# Altium PCB STM32 with USB-C.PcbDoc
Units mm, origin at the board's own origin, x right, y up, seen from the top; angles counter-clockwise.
Board outline 36 x 36 mm, 4 copper layers (L1 (SIgnal), L2 (GND), L3 (GND), L4 (SIgnal)), stack 1.57 mm thick; 38 components, 28 nets, 183 pads, 96 vias.
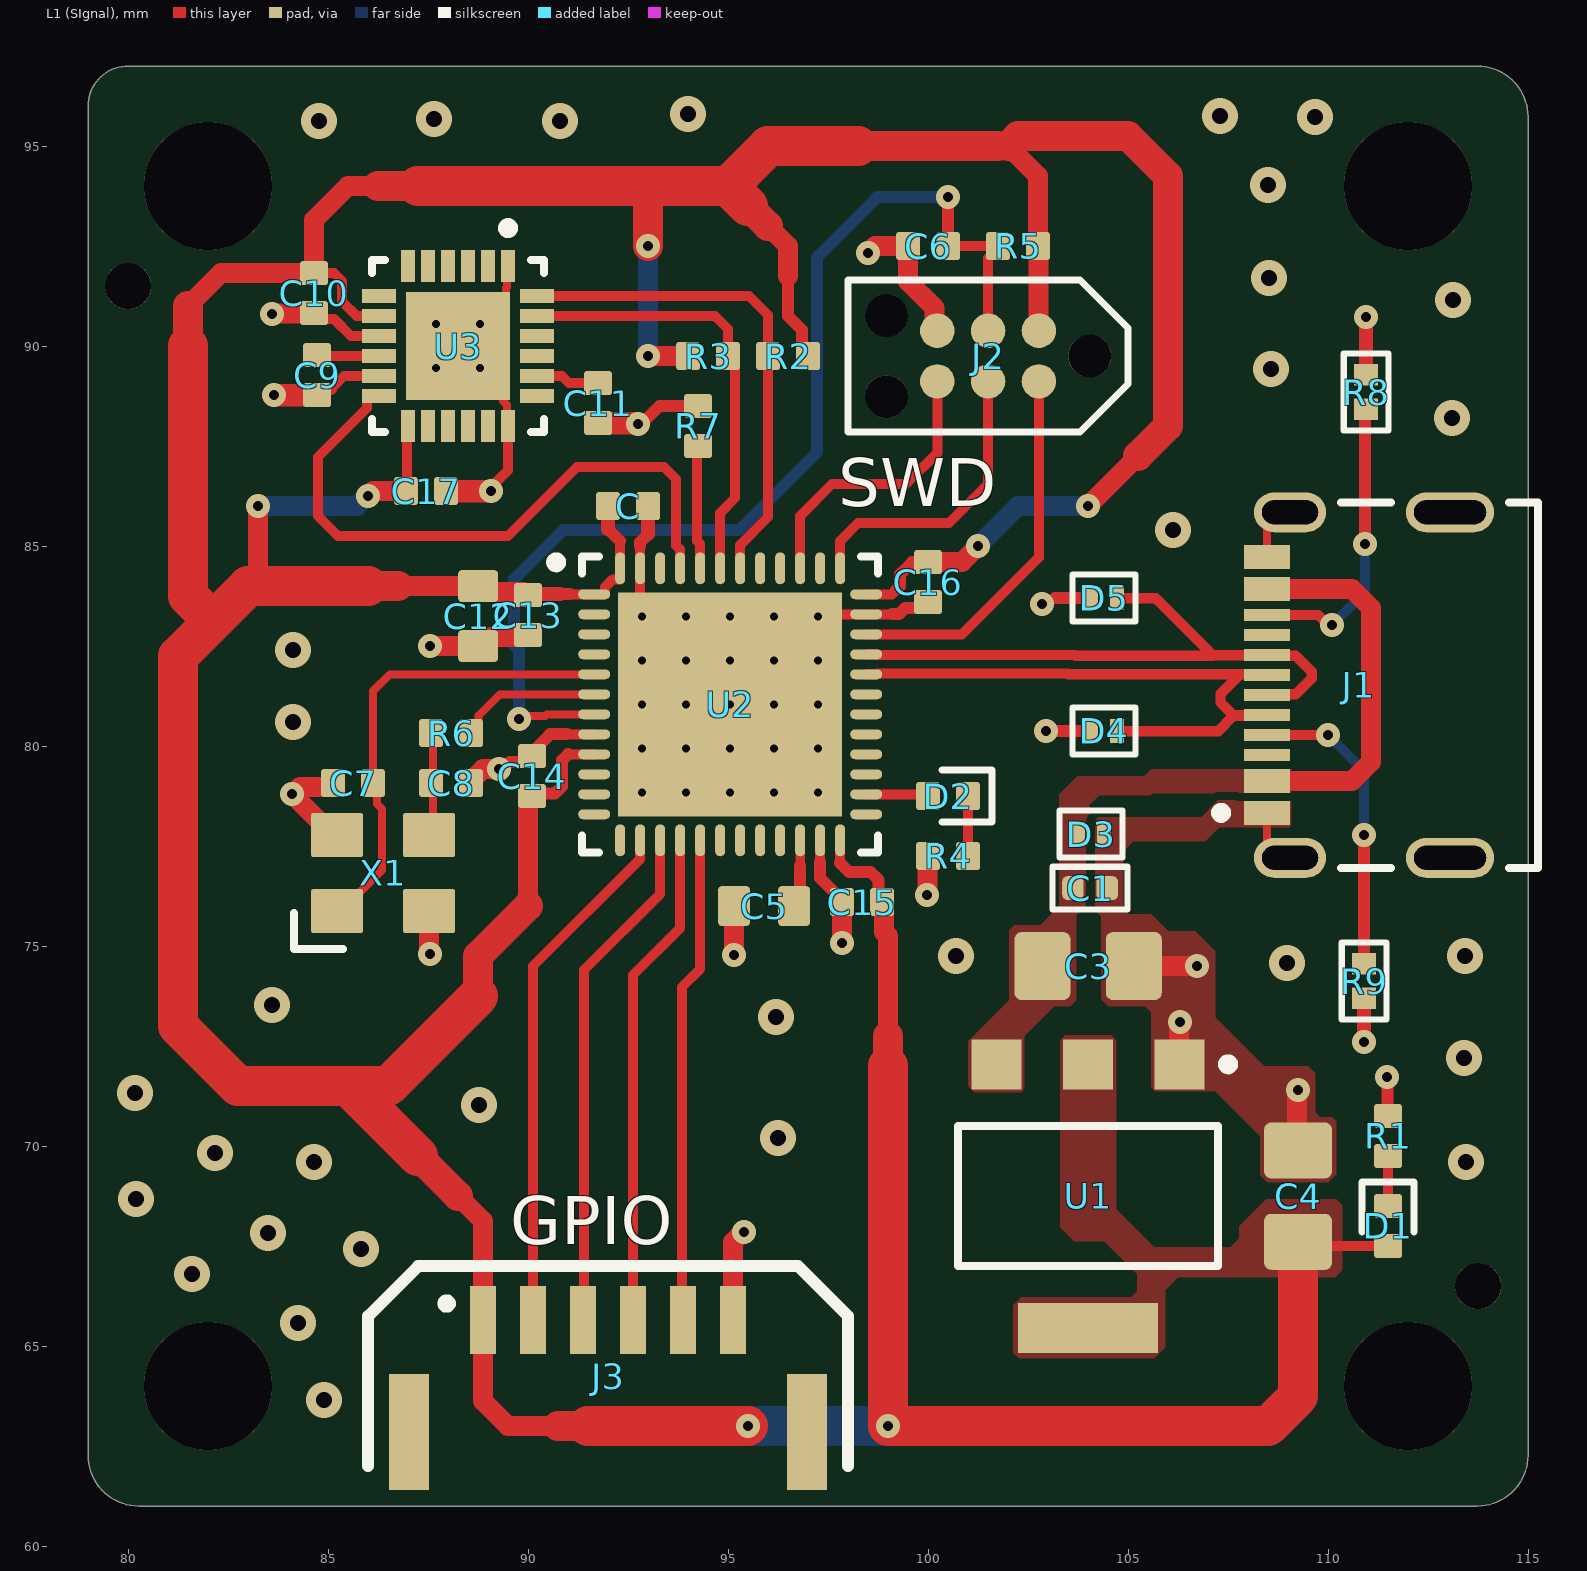
[diagram p0: L1 (SIgnal) view]
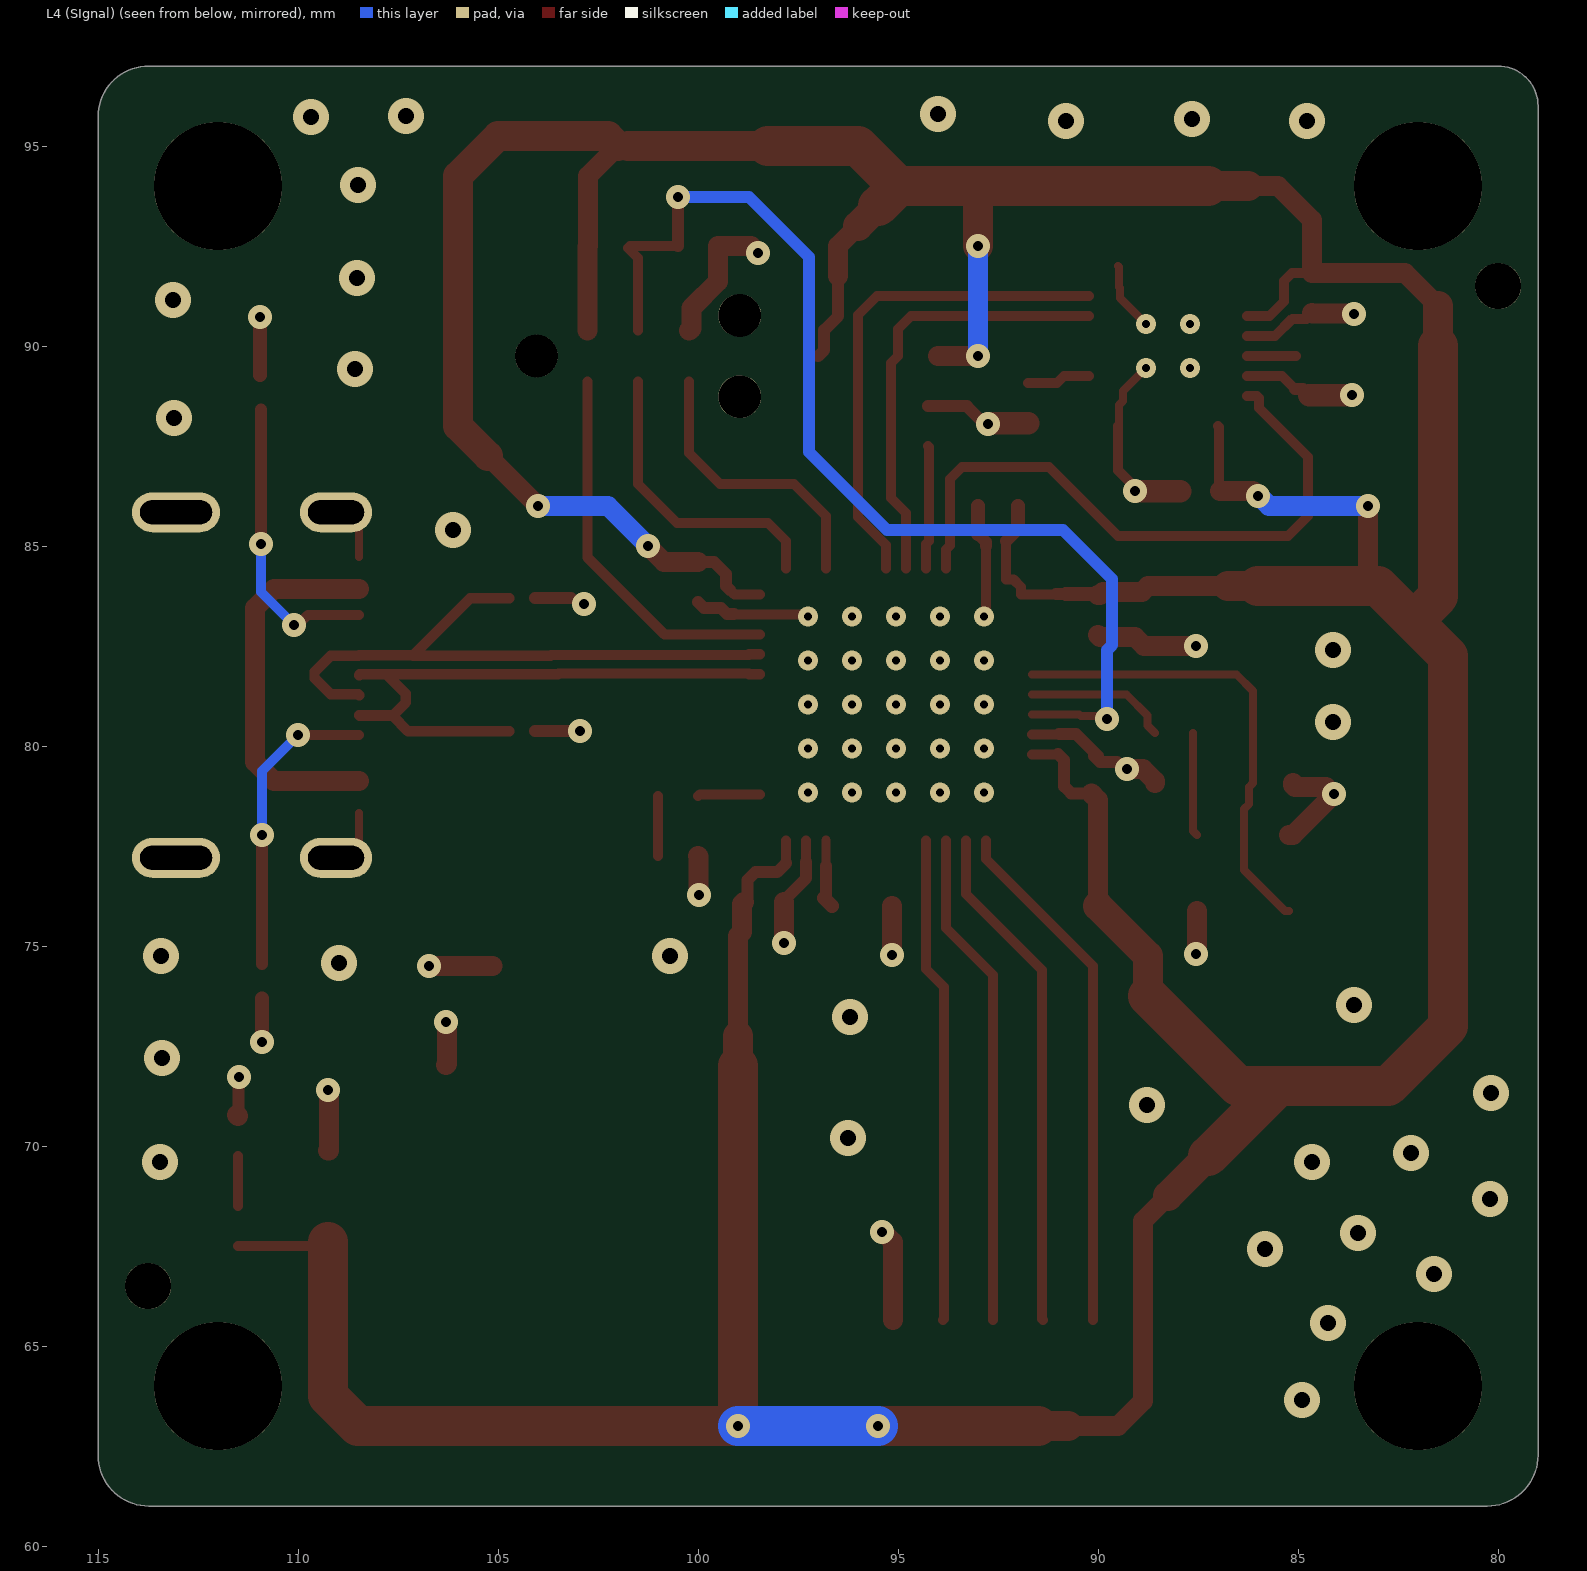
[diagram p1: L4 (SIgnal) view, seen from below]
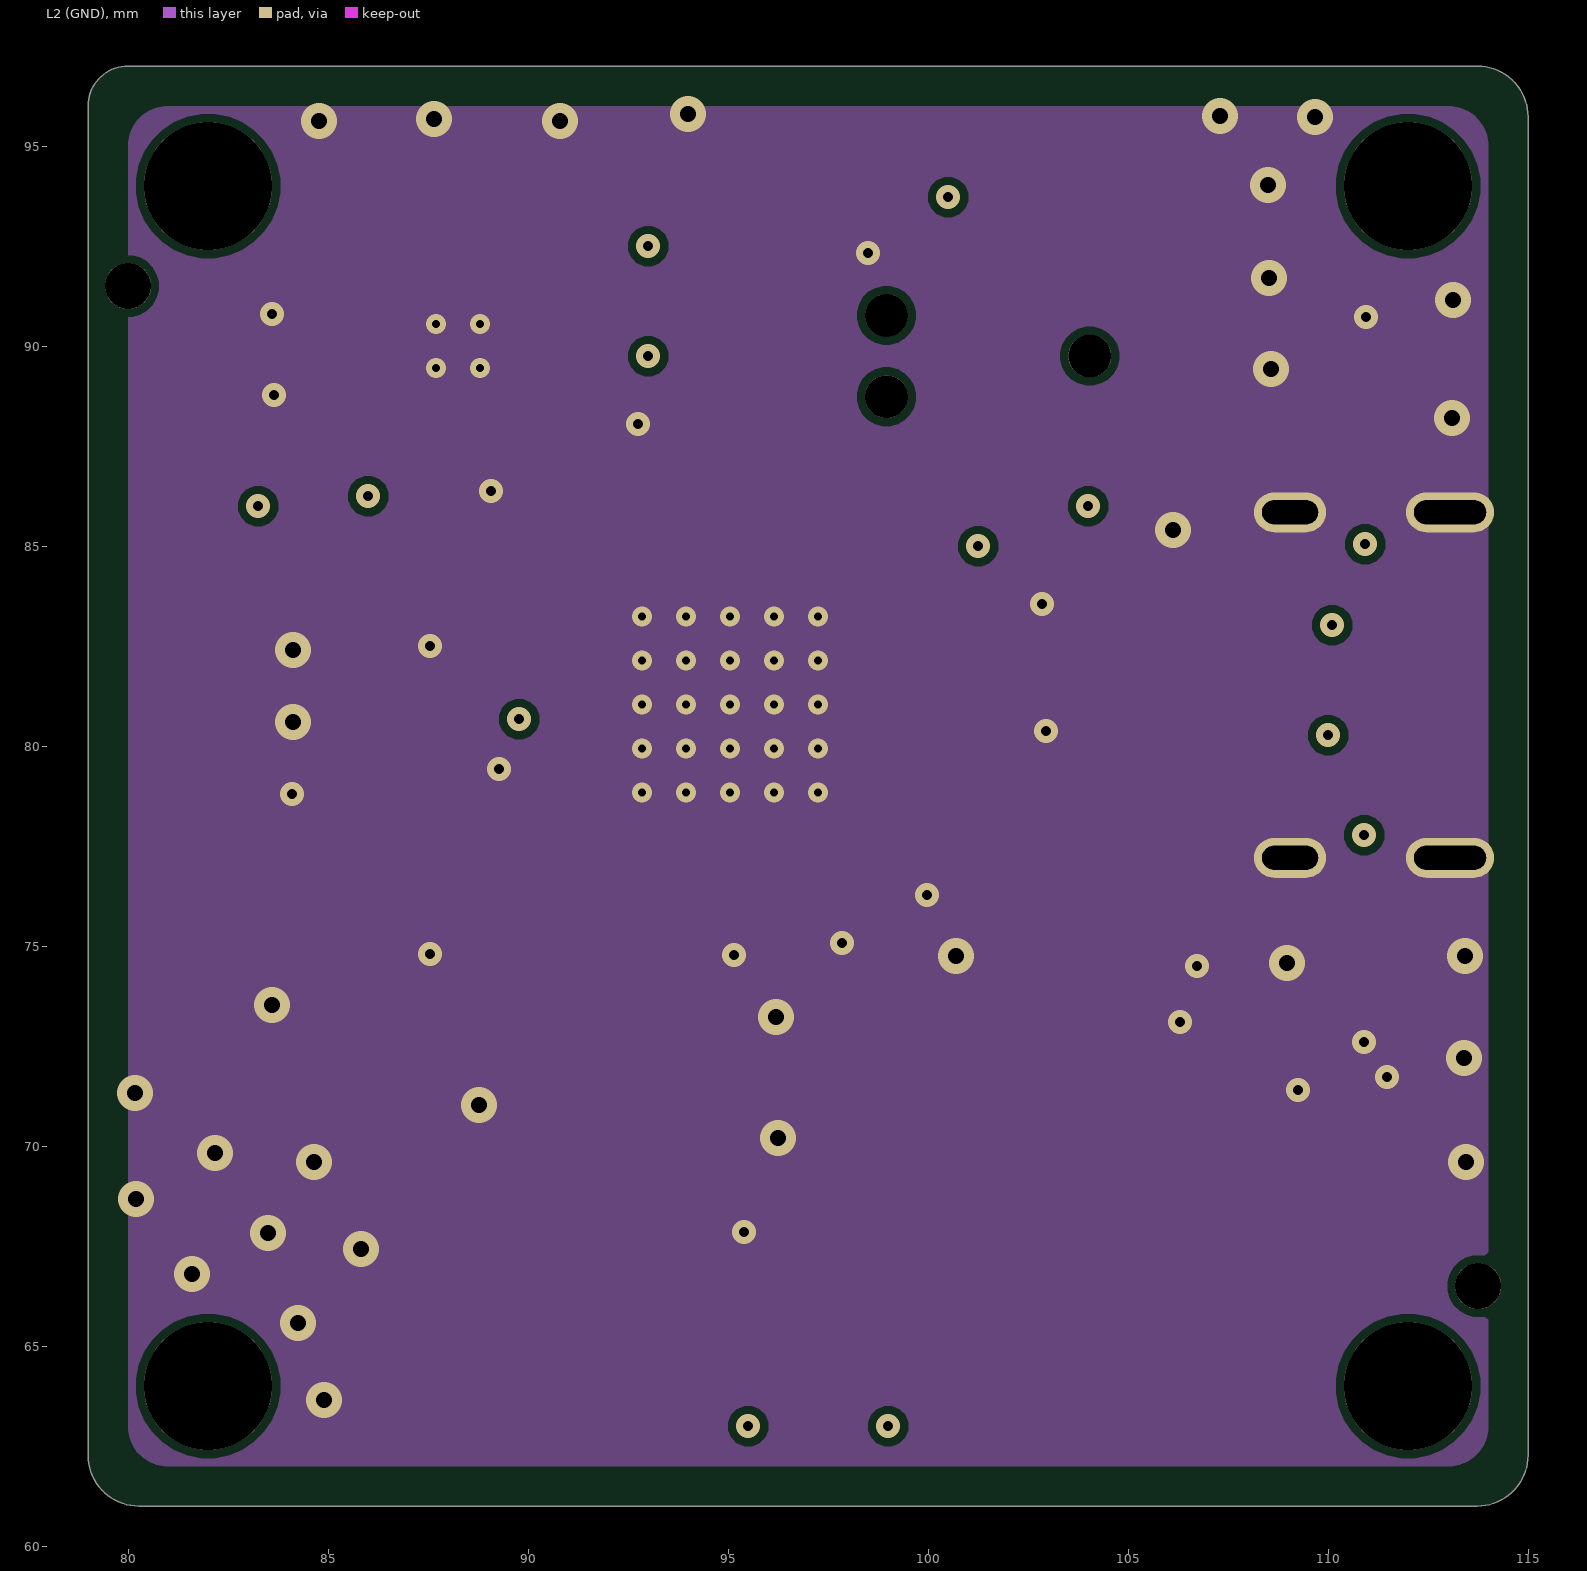
[diagram p2: L2 (GND)]
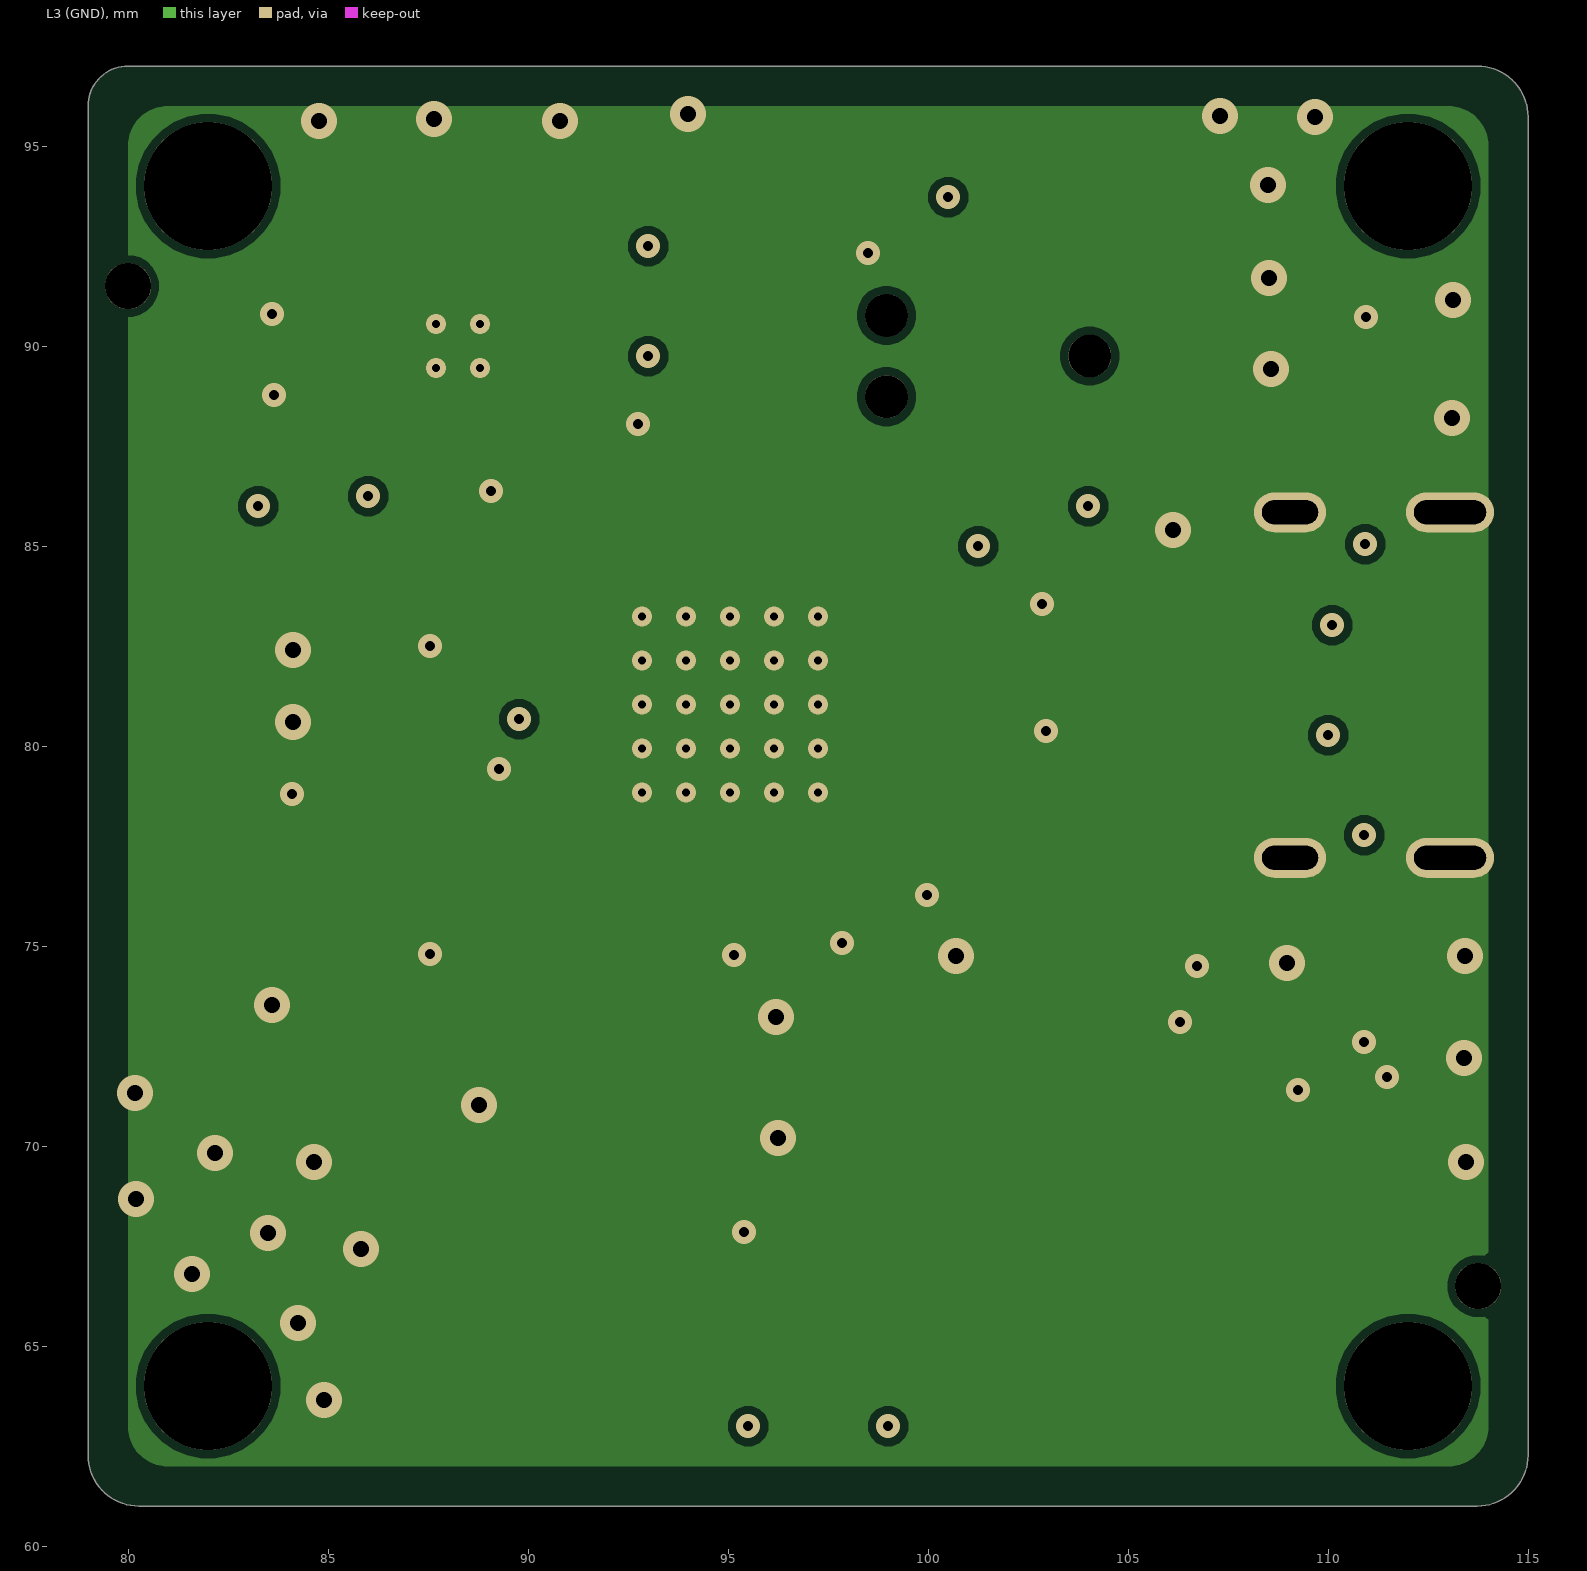
[diagram p3: L3 (GND)]
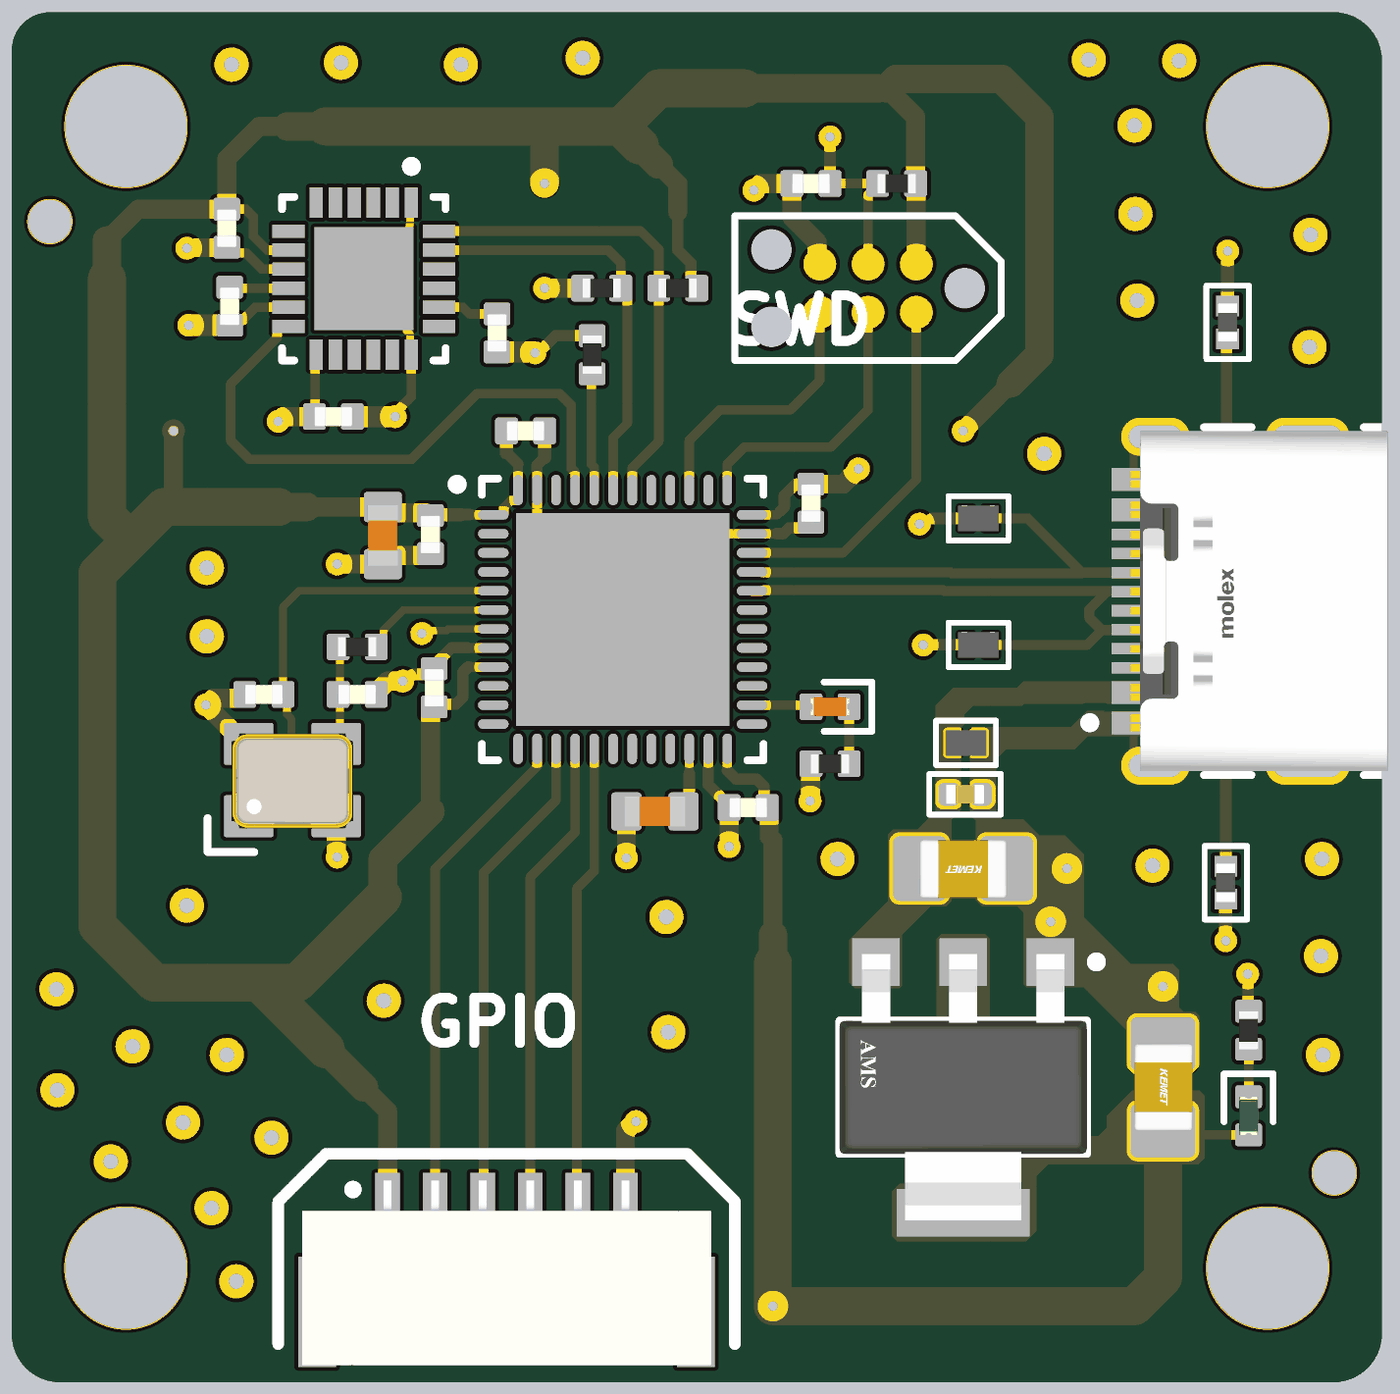
[diagram p4: 3D render of the assembled board from above, using the file's embedded part models]

## Layer stack, top to bottom
Top Solder: solder mask 0.0254, SM-001, Dk 4
L1 (SIgnal): signal copper 0.035
Dielectric 1: prepreg 0.2, PP-017, Dk 4.6
L2 (GND): signal copper 0.0175
Dielectric 3: core 1.065, Core-039, Dk 4.6
L3 (GND): signal copper 0.0175
Dielectric 5: prepreg 0.2, PP-017, Dk 4.6
L4 (SIgnal): signal copper 0.035
Bottom Solder: solder mask 0.0254, SM-001, Dk 4

## Board outline
79,62.27 79,96 cw(c80,96) 80,97 113.73,97 cw(c113.73,95.73) 115,95.73 115,62.27 cw(c113.73,62.27) 113.73,61 80.27,61 cw(c80.27,62.27)

## Design rules (kind name [scope] priority, off if disabled: settings)
Clearance [All] p1: gap=0.2 ignorepadtopadclearanceinfootprint=TRUE
DiffPairsRouting [All] p1: maxlimit=0.254 minlimit=0.203 mostfreqgap=0.254 toplayer_maxgap=0.203 toplayer_prefgap=0.203 toplayer_minwidth=0.26 toplayer_maxwidth=0.26 toplayer_prefwidth=0.26 bottomlayer_maxgap=0.203 bottomlayer_prefgap=0.203 bottomlayer_minwidth=0.26 bottomlayer_maxwidth=0.26 bottomlayer_prefwidth=0.26 impedanceprofiledriven=TRUE impedanceprofileid={7F84C1FC-614D-44AF-B792-7ED8B26A1299} impedanceprofilevalue=90.000000 maxuncoupledlength=12.7
HoleSize [All] p1: absolutevalues=TRUE maxlimit=3.5 minlimit=0.025 maxpercent=80.000 minpercent=20.000
MinimumSolderMaskSliver [All] p1: minsoldermaskwidth=0.1
PolygonConnect [All] p1: connectstyle=Direct reliefconductorwidth=0.254 reliefentries=4 polygonreliefangle="90 Angle" airgapwidth=0.254
RoutingVias [All] p1: holewidth=0.3 width=0.7 viastyle="Through Hole" minholewidth=0.25 minwidth=0.55 maxholewidth=0.4 maxwidth=0.9
SilkToSolderMaskClearance [IsPad] p1: minsilkscreentomaskgap=0 clearancetoexposedcopper=TRUE
SolderMaskExpansion [All] p1: expansion=0.102 istentingtop=FALSE
SupplyNets "Schematic Supply Nets_1" [InNet('+5V')] p1: voltage=0.000
SupplyNets "Schematic Supply Nets_2" [InNet('+3V3')] p2: voltage=0.000
SupplyNets "Schematic Supply Nets" [InNet('GND')] p3: voltage=0.000
UnRoutedNet [All] p1: checkbadconnections=TRUE
Width [All] p1: maxlimit=1 minlimit=0.2 preferedwidth=0.3 midlayer1_minwidth=0.254 midlayer1_maxwidth=0.254 midlayer1_prefwidth=0.254 midlayer2_minwidth=0.254 midlayer2_maxwidth=0.254 midlayer2_prefwidth=0.254 minimp=50.000000 maximp=50.000000 favimp=50.000000
25 further rules are at their usual default settings.

## Classes and differential pairs
differential pair class DIFF_USB: USB_D
differential pair class DIFF90: USB_D
differential pair USB_D: +USB_D_P -USB_D_N

## Components (designator, comment, footprint, x,y, rotation, side; value= is the part's Value field where it differs from the comment)
C "100n" CAP_0402 92.5,86 r180 top
C1 "100nF, 50V" CAPC1005X55N 104.05,76.45 r180 top value=100nF
C3 "22u" CAP_0805 104,74.5 r180 top
C4 "22u" CAP_0805 109.25,68.75 r270 top
C5 "2u2" CAP_0603 95.9,76 r0 top
C6 "100n" CAP_0402 100,92.5 r0 top
C7 "10p" CAP_0402 85.625,79.075 r0 top
C8 "10p" CAP_0402 88.075,79.075 r180 top
C9 "100n" CAP_0402 84.725,89.275 r90 top
C10 "100n" CAP_0402 84.65,91.325 r90 top
C11 "2n2" CAP_0402 91.75,88.575 r90 top
C12 "2u2" CAP_0603 88.75,83.25 r90 top
C13 "100n" CAP_0402 90,83.275 r90 top
C14 "100n" CAP_0402 90.1,79.25 r270 top
C15 "100n" CAP_0402 98.35,76.1 r0 top
C16 "100n" CAP_0402 100,84.1 r90 top
C17 "100n" CAP_0402 87.45,86.375 r180 top
D1 "GREEN" LED_0402_GREEN 111.5,68 r90 top
D2 "RED" LED_0402_RED 100.5,78.75 r0 top
D3 "AQ3045-01ETG" SOD882 104.075,77.8 r180 top
D4 "AQ3045-01ETG" SOD882 104.4,80.375 r0 top
D5 "AQ3045-01ETG" SOD882 104.4,83.7 r0 top
J1 "217179-0001" FP-2171790001-MFG 111.9,81.525 r90 top
J2 "TC2030-NL" TC2030-NL-FP 101.5,89.75 r180 top
J3 "SM06B-GHS-TB" SM06B-GHS-TB 92,64.25 r0 top
R1 "1k" RES_0402 111.5,70.25 r270 top
R2 "2k2" RES_0402 96.5,89.75 r0 top
R3 "2k2" RES_0402 94.5,89.75 r180 top
R4 "1k" RES_0402 100.5,77.25 r0 top
R5 "10k" RES_0402 102.25,92.5 r0 top
R6 "0R" RES_0402 88.075,80.325 r0 top
R7 "10k" RES_0402 94.25,88 r270 top
R8 "5K1" RESC1005X37N 110.95,88.85 r270 top value=5.1kΩ
R9 "5K1" RESC1005X37N 110.9,74.125 r90 top value=5.1kΩ
U1 "ams1117" FP-ams1117-IPC_C 104,68.75 r270 top
U2 "STM32F411CEU6" STM-UFQFPN48_L 95.053,81.045 r0 top
U3 "MPU-6050" IS-QFN-24_V 88.25,90 r270 top
X1 "24MHz" XTAL_3225 86.375,76.825 r0 top

## Footprints (in the part's own frame and the unit in brackets; to place one, negate y for a bottom-side part, rotate by r counter-clockwise, add the part's x,y. Pads: shape width x height; smd on the part's side, far side on the other; paste and mask are expansions set on the pad)
CAP_0402 [mm]
  rrect25% 0.6x0.7 smd: 1(-0.5,0) 2(0.5,0)
  body extent -0.5,-0.26 0.5,0.26, height 0.37
CAP_0603 [mm]
  rrect25% 0.8x1 smd: 1(-0.75,0) 2(0.75,0)
  body extent -0.8,-0.4 0.8,0.4, height 0.51
CAP_0805 [mm]
  rrect25% 1.4x1.7 smd: 1(-1.143,0) 2(1.143,0)
  body extent -1.15,-0.76 1.15,0.79, height 1.01
CAPC1005X55N [mm]
  rrect53% 0.54x0.6 smd: 1(-0.43,0) 2(0.43,0)
  silkscreen extent -0.94,-0.53 0.94,0.53, body extent -0.5,-0.25 0.5,0.25, height 0.55
FP-2171790001-MFG [mm]
  rect 0.6x1.15 smd paste+0 mask+0: A1B12(-3.2,3.425) A4B9(-2.4,3.425) B1A12(3.2,3.425) B4A9(2.4,3.425)
  rect 0.3x1.15 smd paste+0 mask+0: A5(-1.25,3.425) A6(-0.25,3.425) A7(0.25,3.425) A8(1.25,3.425) B5(1.75,3.425) B6(0.75,3.425) B7(-0.75,3.425) B8(-1.75,3.425)
  rrect100% 1x1.8 hole 1.4 slot 0.6 at 0 deg paste-2539.97 mask+0: S1(-4.32,2.85) S2(4.32,2.85)
  rrect100% 1x2.2 hole 1.8 slot 0.6 at 0 deg paste-2539.97 mask+0: S3(-4.32,-1.15) S4(4.32,-1.15)
  silkscreen extent -4.57,-3.35 4.57,4.7, body extent -4.92,-3.45 4.92,4.1, height 0.25
FP-ams1117-IPC_C [mm]
  rect 1.25x1.25 smd paste+0 mask+0: 1(-3.295,2.29) 2(-3.295,0) 3(-3.295,-2.29)
  rect 1.25x3.5 smd paste+0 mask+0: 4(3.295,0)
  silkscreen extent -3.42,-3.25 1.75,3.63, body extent -3.9,-3.35 3.9,3.35, height 0.25
IS-QFN-24_V [mm] "QFN, 24-Leads, Body 4x4mm, Pitch 0.5mm, Thermal Pad 2.7x2.6mm"
  rect 0.8x0.35 smd: 1(-2,1.25) 2(-2,0.75) 3(-2,0.25) 4(-2,-0.25) 5(-2,-0.75) 6(-2,-1.25) 13(2,-1.25) 14(2,-0.75) 15(2,-0.25) 16(2,0.25) 17(2,0.75) 18(2,1.25)
  rect 0.35x0.85 smd mask+0.102: 7(-1.25,-1.975) 8(-0.75,-1.975) 9(-0.25,-1.975) 10(0.25,-1.975) 11(0.75,-1.975) 12(1.25,-1.975) 19(1.25,1.975) 20(0.75,1.975) 21(0.25,1.975) 22(-0.25,1.975) 23(-0.75,1.975) 24(-1.25,1.975)
  rect 2.7x2.6 smd: 25(0,0)
  silkscreen extent -3.07,-2.15 2.15,2.15, body extent -2,-2 2,2, height 0.95
LED_0402_GREEN [mm]
  rrect25% 0.6x0.7 smd: A(-0.5,0) K(0.5,0)
  silkscreen extent -0.15,-0.65 1.1,0.65, body extent -0.51,-0.25 0.51,0.25, height 0.45
LED_0402_RED [mm]
  rrect25% 0.6x0.7 smd: A(-0.5,0) K(0.5,0)
  silkscreen extent -0.15,-0.65 1.1,0.65, body extent -0.51,-0.25 0.51,0.25, height 0.45
RES_0402 [mm]
  rrect25% 0.6x0.7 smd: 1(-0.5,0) 2(0.5,0)
  body extent -0.5,-0.25 0.5,0.25, height 0.3
RESC1005X37N [mm]
  rect 0.54x0.6 smd: 1(-0.432,0) 2(0.432,0)
  silkscreen extent -0.97,-0.56 0.97,0.56, body extent -0.5,-0.25 0.5,0.25, height 0.37
SM06B-GHS-TB [mm]
  rect 0.65x1.7 smd: 1(-3.125,1.4) 2(-1.875,1.4) 3(-0.625,1.4) 4(0.625,1.4) 5(1.875,1.4) 6(3.125,1.4)
  rect 1x2.9 smd: ""(-4.975,-1.4) ""(4.975,-1.4)
  silkscreen extent -6,-2.25 6,2.75, body extent -5.38,-2.8 5.38,2.05, height 4.26
SOD882 [mm]
  rect 0.35x0.6 smd: 1(-0.325,0) 2(0.325,0)
  silkscreen extent -0.79,-0.58 0.79,0.58, body extent -0.54,-0.34 0.54,0.34, height 0.44
STM-UFQFPN48_L [mm] "QFN, 48-Leads, Body 7.1x7.1mm, Pitch 0.5mm, Thermal Pad 5.6x5.6mm, IPC High Density"
  oval 0.8x0.25 smd: 1(-3.4,2.75) 2(-3.4,2.25) 3(-3.4,1.75) 4(-3.4,1.25) 5(-3.4,0.75) 6(-3.4,0.25) 7(-3.4,-0.25) 8(-3.4,-0.75) 9(-3.4,-1.25) 10(-3.4,-1.75) 11(-3.4,-2.25) 12(-3.4,-2.75) 25(3.4,-2.75) 26(3.4,-2.25) 27(3.4,-1.75) 28(3.4,-1.25) 29(3.4,-0.75) 30(3.4,-0.25) 31(3.4,0.25) 32(3.4,0.75) 33(3.4,1.25) 34(3.4,1.75) 35(3.4,2.25) 36(3.4,2.75)
  oval 0.25x0.8 smd: 13(-2.75,-3.4) 14(-2.25,-3.4) 15(-1.75,-3.4) 16(-1.25,-3.4) 17(-0.75,-3.4) 18(-0.25,-3.4) 19(0.25,-3.4) 20(0.75,-3.4) 21(1.25,-3.4) 22(1.75,-3.4) 23(2.25,-3.4) 24(2.75,-3.4) 37(2.75,3.4) 38(2.25,3.4) 39(1.75,3.4) 40(1.25,3.4) 41(0.75,3.4) 42(0.25,3.4) 43(-0.25,3.4) 44(-0.75,3.4) 45(-1.25,3.4) 46(-1.75,3.4) 47(-2.25,3.4) 48(-2.75,3.4)
  rect 5.6x5.6 smd: 49(0,0)
  silkscreen extent -4.47,-3.7 3.7,3.7, body extent -3.55,-3.55 3.55,3.55, height 0.6
TC2030-NL-FP [mil]
  round 33.98 smd paste-16.99: 1(-50,-25) 2(-50,25) 3(0,-25) 4(0,25) 5(50,-25) 6(50,25)
  round 42.01 hole 42.01 unplated: MH(-100,0) MH(100,-40) MH(100,40)
  silkscreen extent -138,-75 138,75
XTAL_3225 [mm]
  rrect10% 1.3x1.1 smd: 1(-1.15,-0.95) 2(1.15,-0.95) 3(1.15,0.95) 4(-1.15,0.95)
  silkscreen extent -2.23,-1.89 -1,-1, body extent -1.6,-1.28 1.6,1.22, height 0.61

## Part data
C C6 C13 C14 C15 C16 C17: library part CAP_0402, "Capacitor SMD 0402"
C1: library part CL05B104KB5NNNC, "CAP CER 0.1UF 50V X7R 0402", Case/Package=0402, Dielectric=X7R, Dielectric Material=Ceramic, Manufacturer="Samsung Electro-Mechanics", Max Operating Temperature=125°C, Min Operating Temperature=-55°C, Supplier Part Number=1276-CL05B104KB5NNNCCT-ND, Tolerance=10%, Voltage Rating=50V, Category="Ceramic Capacitors", China RoHS=Compliant, ComponentLink1Description=https://datasheet.octopart.com:443/CL05B104KB5NNNC-Samsung-Electro-Mechanics-datasheet-141346860.pdf?src-supplier=IHS, ComponentLink1URL=https://datasheet.octopart.com:443/CL05B104KB5NNNC-Samsung-Electro-Mechanics-datasheet-141346860.pdf?src-supplier=IHS, ComponentLink2Description=https://datasheet.octopart.com:443/CL05B104KB5NNNC-Samsung-datasheet-97040617.pdf?src-supplier=Future+Electronics, ComponentLink2URL=https://datasheet.octopart.com:443/CL05B104KB5NNNC-Samsung-datasheet-97040617.pdf?src-supplier=Future+Electronics, ComponentLink3Description=https://datasheet.octopart.com:443/CL05B104KB5NNNC-Samsung-datasheet-8326407.pdf?src-supplier=TME, ComponentLink3URL=https://datasheet.octopart.com:443/CL05B104KB5NNNC-Samsung-datasheet-8326407.pdf?src-supplier=TME, Height=550µm, LCSC Part Number=CL05B104KB5NNNC, Lifecycle Status=Production, Manufacturer Part Number=CL05B104KB5NNNC, Material=Ceramic, Mounting Technology="Surface Mount", Number of Terminals=2, Pricing="1=0.08, 10=0.010, 50=0.0088, 100=0.008 (USD)", REACH SVHC=Yes, RoHS=Compliant, Stock=1636938, Supplier=DigiKey, Voltage Rating (DC)=50V
C3 C4: library part CAP_0805, "Capacitor SMD 0805 16V"
C5 C12: library part CAP_0603, "Capacitor SMD 0603"
C7 C8 C9 C10 C11: library part CAP_0402, "Capacitor SMD 0402 16V"
D1: library part LED_0402_GREEN, "LED 0402 GREEN SMD"
D2: library part LED_0402_RED, "LED 0402 RED SMD"
D3 D4 D5: "Bi 30Kv 5V 0.35Pf Automotve Tvs Sod882/ T&r Rohs Compliant: Yes", Breakdown Voltage=7.8V, Clamping Voltage=12V, Leakage Current=100nA, Manufacturer=Littelfuse, Max Breakdown Voltage=9V, Max Operating Temperature=150°C, Min Breakdown Voltage=6.8V, Min Operating Temperature=-40°C, Operating Supply Voltage=5.3V, Peak Pulse Power=40W, Supplier Part Number=F9321CT-ND, Category="TVS Diodes", ComponentLink1Description=https://datasheet.octopart.com:443/AQ3045-01ETG-Littelfuse-datasheet-180606588.pdf?src-supplier=IHS, ComponentLink1URL=https://datasheet.octopart.com:443/AQ3045-01ETG-Littelfuse-datasheet-180606588.pdf?src-supplier=IHS, ComponentLink2Description=https://datasheet.octopart.com:443/AQ3045-01ETG-Littelfuse-datasheet-140480283.pdf?src-supplier=ODG+(Origin+Data+Global), ComponentLink2URL=https://datasheet.octopart.com:443/AQ3045-01ETG-Littelfuse-datasheet-140480283.pdf?src-supplier=ODG+(Origin+Data+Global), ComponentLink3Description=https://datasheet.octopart.com:443/AQ3045-01ETG-Littelfuse-datasheet-101609968.pdf?src-supplier=Farnell, ComponentLink3URL=https://datasheet.octopart.com:443/AQ3045-01ETG-Littelfuse-datasheet-101609968.pdf?src-supplier=Farnell, ComponentLink4Description=https://datasheet.octopart.com:443/AQ3045-01ETG-Littelfuse-datasheet-183003566.pdf?src-supplier=JRH+Electronics, ComponentLink4URL=https://datasheet.octopart.com:443/AQ3045-01ETG-Littelfuse-datasheet-183003566.pdf?src-supplier=JRH+Electronics, ComponentLink5Description=https://datasheet.octopart.com:443/AQ3045-01ETG-Littelfuse-datasheet-170904929.pdf?src-supplier=Future+Electronics, ComponentLink5URL=https://datasheet.octopart.com:443/AQ3045-01ETG-Littelfuse-datasheet-170904929.pdf?src-supplier=Future+Electronics, Lifecycle Status=Production, Manufacturer Part Number=AQ3045-01ETG, Mounting Technology="Surface Mount", Number of Channels=1, Number of Elements=1, Number of Terminals=2, Packaging="Cut Tape", Peak Reverse Current=100nA, Polarity=Bidirectional, Pricing="1=0.43, 10=0.271, 100=0.141, 500=0.131 (USD)", REACH SVHC=Yes, Reverse Standoff Voltage=5.3V, RoHS=Compliant, Stock=11182, Supplier=DigiKey
J1: "USB Connector, USB Type C, USB 2.0, Receptacle, 16 Ways, Surface Mount, Through Hole Mount", Contact Resistance=50mΩ, Current Rating=1.25A, Dielectric Material=Polyamide, Insulation Resistance=100MΩ, LCSC Part Number=C3197684, Manufacturer=Molex, Max Operating Temperature=85°C, Min Operating Temperature=-40°C, Supplier Part Number=900-2171790001DKR-ND, Voltage Rating=30V, Category="USB Connectors", ComponentLink1Description=https://datasheet.octopart.com:443/217179-0001-Molex-datasheet-158871109.pdf?src-supplier=ODG+(Origin+Data+Global), ComponentLink1URL=https://datasheet.octopart.com:443/217179-0001-Molex-datasheet-158871109.pdf?src-supplier=ODG+(Origin+Data+Global), ComponentLink2Description=https://sigma.octopart.com:443/158871110/technical_drawing/Molex-217179-0001.pdf?src-supplier=Upverter, ComponentLink2URL=https://sigma.octopart.com:443/158871110/technical_drawing/Molex-217179-0001.pdf?src-supplier=Upverter, ComponentLink3Description=https://datasheet.octopart.com:443/217179-0001-Molex-datasheet-164573281.pdf?src-supplier=RS+(Formerly+Allied+Electronics), ComponentLink3URL=https://datasheet.octopart.com:443/217179-0001-Molex-datasheet-164573281.pdf?src-supplier=RS+(Formerly+Allied+Electronics), ComponentLink4Description=http://sigma.octopart.com:80/conflict_mineral_statement/Molex-company-72.pdf?src-supplier=Compliance+Statements, ComponentLink4URL=http://sigma.octopart.com:80/conflict_mineral_statement/Molex-company-72.pdf?src-supplier=Compliance+Statements, ComponentLink5Description=http://sigma.octopart.com:80/rohs_statement/Molex-company-73.pdf?src-supplier=Compliance+Statements, ComponentLink5URL=http://sigma.octopart.com:80/rohs_statement/Molex-company-73.pdf?src-supplier=Compliance+Statements, ComponentLink6Description=http://sigma.octopart.com:80/reach_statement/Molex-company-74.pdf?src-supplier=Compliance+Statements, ComponentLink6URL=http://sigma.octopart.com:80/reach_statement/Molex-company-74.pdf?src-supplier=Compliance+Statements, Contact Gender=Female, Contact Material="Gold, Nickel", Gender=Receptacle, Height=3.36mm, Lifecycle Status=Production, Manufacturer Part Number=217179-0001, Number Of Contacts=16, Number of Ports=1, Number of Rows=1, Pins=16, Pricing="1=0.83, 10=0.704, 25=0.6596, 50=0.628, 100=0.598, 250=0.56052, 500=0.53374 (USD)", REACH SVHC=Yes, RoHS=Compliant, Shell Finish=Nickel, Shell Material="Stainless Steel", Stock=29627, Supplier=DigiKey, Terminal Pitch=500µm, Usb Standard="USB 2.0"
J2: "Tag-Connect No-Solder SWD Debug Connector (No Legs) DO NOT PLACE", Manufacturer=Tag-Connect, Manufacturer Part Number=TC2030-NL-FP
J3: "Header Connector 6 Position 1.25MM Pitch SMD Horizontal JST GH", Manufacturer=JST, Manufacturer Part Number=SM06B-GHS-TB
R1 R2 R3 R4 R5 R7: library part RES_0402, "Resistor SMD 0402"
R6: library part RES_0402, "Resistor SMD 0402 0R"
R8 R9: library part AC0402FR-075K1L, "Res Thick Film 0402 5.1K Ohm 1% 0.063W(1/16W) ±100ppm/C Pad SMD Automotive T/R", Case Code (Imperial)=0402, Case Code (Metric)=1005, LCSC Part Number=C144745, Manufacturer="Yageo Group", Max Operating Temperature=155°C, Max Power Dissipation=63mW, Min Operating Temperature=-55°C, Power Dissipation=62.5mW, Supplier Part Number=YAG3503CT-ND, Temperature Coefficient=100ppm/°C, Tolerance=1%, Voltage Rating=50V, Case/Package=0402, Category="Chip SMD Resistors", China RoHS=Non-Compliant, ComponentLink1Description=https://datasheet.octopart.com:443/AC0402FR-075K1L-Yageo-datasheet-182189377.pdf?src-supplier=IHS, ComponentLink1URL=https://datasheet.octopart.com:443/AC0402FR-075K1L-Yageo-datasheet-182189377.pdf?src-supplier=IHS, ComponentLink2Description=https://datasheet.octopart.com:443/AC0402FR-075K1L-Yageo-datasheet-83209224.pdf?src-supplier=Upverter, ComponentLink2URL=https://datasheet.octopart.com:443/AC0402FR-075K1L-Yageo-datasheet-83209224.pdf?src-supplier=Upverter, ComponentLink3Description=https://datasheet.octopart.com:443/AC0402FR-075K1L-Yageo-datasheet-178509465.pdf?src-supplier=Newark, ComponentLink3URL=https://datasheet.octopart.com:443/AC0402FR-075K1L-Yageo-datasheet-178509465.pdf?src-supplier=Newark, ComponentLink4Description=https://datasheet.octopart.com/AC0402FR-075K1L-Yageo-datasheet-12512238.pdf, ComponentLink4URL=https://datasheet.octopart.com/AC0402FR-075K1L-Yageo-datasheet-12512238.pdf, ComponentLink5Description=https://datasheet.octopart.com:443/AC0402FR-075K1L-Yageo-datasheet-166720450.pdf?src-supplier=Future+Electronics, ComponentLink5URL=https://datasheet.octopart.com:443/AC0402FR-075K1L-Yageo-datasheet-166720450.pdf?src-supplier=Future+Electronics, ComponentLink6Description=https://datasheet.octopart.com:443/AC0402FR-075K1L-Yageo-datasheet-151884373.pdf?src-supplier=Future+Electronics, ComponentLink6URL=https://datasheet.octopart.com:443/AC0402FR-075K1L-Yageo-datasheet-151884373.pdf?src-supplier=Future+Electronics, ComponentLink7Description=https://datasheet.octopart.com:443/AC0402FR-075K1L-Yageo-datasheet-137699919.pdf?src-supplier=Future+Electronics, ComponentLink7URL=https://datasheet.octopart.com:443/AC0402FR-075K1L-Yageo-datasheet-137699919.pdf?src-supplier=Future+Electronics, ComponentLink8Description=https://datasheet.octopart.com:443/AC0402FR-075K1L-Yageo-datasheet-24580492.pdf?src-supplier=Future+Electronics, ComponentLink8URL=https://datasheet.octopart.com:443/AC0402FR-075K1L-Yageo-datasheet-24580492.pdf?src-supplier=Future+Electronics, ComponentLink9Description=https://datasheet.octopart.com:443/AC0402FR-075K1L-Yageo-datasheet-13029202.pdf?src-supplier=Future+Electronics, ComponentLink9URL=https://datasheet.octopart.com:443/AC0402FR-075K1L-Yageo-datasheet-13029202.pdf?src-supplier=Future+Electronics, ComponentLink10Description=https://datasheet.octopart.com:443/AC0402FR-075K1L-Yageo-Group-datasheet-164768995.pdf?src-supplier=ODG+(Origin+Data+Global), ComponentLink10URL=https://datasheet.octopart.com:443/AC0402FR-075K1L-Yageo-Group-datasheet-164768995.pdf?src-supplier=ODG+(Origin+Data+Global), ComponentLink11Description=http://sigma.octopart.com:80/rohs_statement/Yageo-company-2.pdf?src-supplier=Compliance+Statements, ComponentLink11URL=http://sigma.octopart.com:80/rohs_statement/Yageo-company-2.pdf?src-supplier=Compliance+Statements, ComponentLink12Description=http://sigma.octopart.com:80/conflict_mineral_statement/Yageo-company-3.pdf?src-supplier=Compliance+Statements, ComponentLink12URL=http://sigma.octopart.com:80/conflict_mineral_statement/Yageo-company-3.pdf?src-supplier=Compliance+Statements, Composition="Thick Film", Depth=500µm, Features="Automotive AEC-Q200, Moisture Resistant", Height=320µm, Lead Free="Lead Free", Length=990.6µm, Lifecycle Status=Production, Manufacturer Part Number=AC0402FR-075K1L, Military Standard=Not, Mounting Technology="Surface Mount", Number of Terminals=2, Number of Terminations=2, Power Rating=62.5mW, Pricing="1=0.1, 10=0.009, 25=0.008, 50=0.0072, 100=0.0066, 250=0.00576, 500=0.00406 (USD)", REACH SVHC=Yes, RoHS=Compliant, Schedule B="8533210045, 8533210045|8533210045|8533210045|8533210045|8533210045|8533210045|8533210045|8533210045|8533210045|8533210045|8533210045|8533210045|8533210045|8533210045|8533210045|8533210045|8533210045|8533210045|8533210045|8533210045|8533210045|8533210045|8533210045|85", Stock=29422, Supplier=DigiKey, Width=500µm, Working Voltage=50V
U1: library part CMP-209535-000002-1, "1A LOW DROPOUT VOLTAGE REGULATOR", RoHS Compliant=Yes
U2: library part CMP-0243-00165-1, "ARM Cortex-M4 32-bit MCU+FPU, 512 KB Flash, 128 KB RAM, 36 I/Os, 48-Pin UFQFPN, -40 to 85 degC, Tray", I/Os (High Current)=36, Operating Frequency(F) (Processor speed) (MHz)=100, Package Description=UFQFPN48, Package Reference="48-Pin Ultra Thin Fine Pitch Quad Flat No-Lead, 7 x 7 x 0.6 mm Body, 0.5 mm Pitch, Exposed Pad", Supply Voltage(Vcc) min (V)=1.7, ComponentLink1Description="Manufacturer URL", ComponentLink1URL=http://www.st.com/, ComponentLink2Description=Datasheet, ComponentLink2URL=http://www.st.com/st-web-ui/static/active/en/resource/technical/document/datasheet/DM00115249.pdf, Core="ARM Cortex-M4", DatasheetVersion="Rev. 6", FLASH Size (Prog) (kB)=512, Internal RAM Size (kB)=128, Mounting Technology="Surface Mount", Packing=Tray
U3: library part CMP-1753-00002-2, "3-Axis Gyroscope, Accelerometer and a Digital Motion Processor(TM) (DMP), 2.375 to 3.46 V, -40 to 85 degC, 24-Pin QFN, RoHS, Tape and Reel", Manufacturer=InvenSense, Standard Package=5,000, Category=Sensors,Transducers, Datasheet URL=http://datasheet.octopart.com/MPU-6050-InvenSense-datasheet-14421344.pdf, Datasheet Version="Rev. 3.3, 05/2012", Dynamic Catalog=MPU-6000™Series, Family=Multifunction, Featured Product=MPU-60506-Axis,IntegratedI²CSolution, Manufacturer URL=http://www.invensense.com/, Online Catalog=MPU-6000™Series, Other Names="1428-1007-2 / MPU6050", Output Type=Digital, Sensor Type=MotionTracking, Unit PriceUSD=Digital
X1: library part TSX-3225_24.0000MF15X-AC, "Crystal SMD 24MHz 10PPM 7pF 3225", Manufacturer=Epson, Manufacturer Part Number="TSX-3225 24.0000MF15X-AC"

## Free pads (board coordinates)
  round 3.2 hole 3.2: MH(82,64) MH(82,94) MH(112,64) MH(112,94)
  round 1.152 hole 1.152: TH(80,91.5) TH(113.75,66.5)

## Via types
v1: diameter 0.6, hole 0.25, L1 (SIgnal) to L4 (SIgnal), 35 vias
v2: diameter 0.9, hole 0.4, L1 (SIgnal) to L4 (SIgnal), 32 vias
v3: diameter 0.5, hole 0.2, L1 (SIgnal) to L4 (SIgnal), 29 vias

## Nets (pads, with @x,y where several pads share a name; then routed paths per layer and width w, separated by ;. In a path a pad name is that pad's centre, name@x,y a point inside that pad or via, vN(x,y) a via of type N, cw(c..) or ccw(c..) an arc to the next point about the centre after c; other vN are vias at no path point)
+3V3: C4.2 C10.2 C12.2 C13.2 C14.2 C15.2 C16.2 C17.2 C.2 D1.A J2.1 J3.1 R2.2 R3.2 R5.2 U1.2 U1.4 U2.1 U2.9 U2.24 U2.36 U2.48 U3.8 U3.13 | length 168.5
  L1 (SIgnal) w0.25: C10.2 85.15,91.825 85.35,91.625 85.35,91.115 85.715,90.75 U3.8 ; C17.2 86.975,86.4 86.975,87.975 U3.13 ; 91,79.8 91.005,79.795 U2.9 ; 91.05,83.8 91.055,83.795 91.928,83.795 91.928,83.979 92.118,84.17 92.303,84.17 92.303,85.12 92.3,85.122 ; 97.8,77.075 97.803,77.078 U2.24 ; U2.36 99.095,83.795 99.2,83.9 ; C4.2 109.357,67.5 D1.A
  L1 (SIgnal) w0.3: C14.2@90.168,78.818 90.674,78.818 90.85,78.994 90.85,79.65 91,79.8 ; 90.8,83.8 91.05,83.8 ; 92,85.425 92.3,85.125 92.3,85.122 ; 96.5,91.75 96.5,90.75 96.85,90.4 96.85,89.9 R2.2 ; 97.8,77.075 98.025,76.85 98.567,76.85 98.762,76.655 98.762,76.188 C15.2 ; 99.2,83.9 99.3,84 99.3,84.3 99.6,84.6 C16.2
  L1 (SIgnal) w0.35: C13.2 90.025,83.8 90.8,83.8 ; 92,85.425 C.2
  L1 (SIgnal) w0.5: 81.5,91 82.325,91.825 C10.2 84.65,93.15 85.5,94 86.25,94 ; 83,84 83.25,84.25 v1(83.25,86) ; v1(86,86.25) 86.125,86.375 C17.2 ; 86.75,84 C12.2 88.9,83.85 89.875,83.85 89.95,83.775 C13.2 ; 88.25,68.75 88.875,68.125 J3.1 88.875,63.625 89.5,63 90.75,63 ; 90,76 90,78.65 C14.2@90.168,78.818 ; v1(93,89.75) R3.2 ; 96,93 96.5,92.5 96.5,91.75 ; C15.2 98.9,76.05 98.9,75.35 99,75.25 99,72.75 ; C16.2 100.85,84.6 v1(101.25,85) ; 102,95 102.75,94.25 R5.2 102.76,92.49 102.76,90.395 J2.1 ; v1(104,86) 105.25,87.25
  L1 (SIgnal) w0.75: 81.5,90 81.5,91 ; 86,84 86.75,84 ; 86.25,94 87.25,94 ; 87.25,69.75 88.25,68.75 ; 88.75,73.75 88.75,74.75 90,76 ; 90.75,63 91.5,63 ; v1(93,92.5) 93,94 ; 95.5,93.5 96,93 ; 98.25,95 101.75,95 ; 99,72 99,72.75 ; 102,95 102.25,95.25 105,95.25 106,94.25 106,88 105.25,87.25
  L1 (SIgnal) w1: 81.5,90 81.5,83.75 82.125,83.125 ; 86,84 83,84 82.125,83.125 ; 87.25,69.75 85.5,71.5 ; 87.25,94 93,94 95,94 ; 88.75,73.75 86.5,71.5 85.5,71.5 ; 91.5,63 v1(95.5,63) ; 95.5,93.5 95,94 ; 98.25,95 96,95 95,94 ; 99,72 v1(99,63) 108.5,63 109.25,63.75 C4.2 ; 82.125,83.125 81.25,82.25 81.25,73 82.75,71.5 85.5,71.5
  L4 (SIgnal) w0.5: v1(83.25,86) 85.723,86 85.973,86.25 v1(86,86.25) ; v1(93,89.75) v1(93,92.5) ; v1(101.25,85) 102.25,86 v1(104,86)
  L4 (SIgnal) w1: v1(95.5,63) v1(99,63)
+5V: C1.2 C3.2 D3.2 J1.A4B9 J1.B4A9 U1.3 | length 9.4
  L1 (SIgnal) w0.5: J1.A4B9 110.6,79.125 111.075,79.6 111.075,83.45 110.6,83.925 J1.B4A9
GND: C1.1 C3.1 C4.1 C5.1 C6.1 C7.1 C8.1 C9.1 C10.1 C11.1 C12.1 C13.1 C14.1 C15.1 C16.1 C17.1 C.1 D3.1 D4.1 D5.1 J1.A1B12 J1.B1A12 J1.S1 J1.S2 J1.S3 J1.S4 J2.5 J3.6 R1.1 R4.1 R7.1 R8.1 R9.1 U1.1 U2.8 U2.23 U2.35 U2.47 U2.49 U3.1 U3.9 U3.11 U3.18 U3.25 X1.2 X1.4 | length 54.6
  L1 (SIgnal) w0.2: v3(88.8,89.45) 89.375,88.875 89.375,88.625 89.475,88.524 89.475,88.025 U3.18 ; v3(88.8,90.55) 89.45,91.2 89.45,91.451 89.475,91.476 89.475,91.975 U3.1 ; v1(102.85,83.55) 102.958,83.55 103.108,83.7 103.175,83.7 ; J1.A1B12 108.475,77.596 108.866,77.205 J1.S1 ; J1.B1A12 108.475,85.454 108.866,85.845 J1.S2
  L1 (SIgnal) w0.25: C10.1 84.793,90.682 85.143,90.682 85.575,90.25 U3.9 ; 85.075,88.925 85.4,89.25 U3.11 ; v1(89.075,86.375) 89.075,86.47 89.5,86.895 U3.18 ; 90.975,80.3 90.98,80.295 U2.8 ; 92.8,85 92.803,84.997 U2.47 92.803,83.295 v3(92.853,83.245) ; v3(97.253,83.245) 97.303,83.295 U2.35 99.095,83.295 99.1,83.3 ; 97.3,77.1 97.303,77.103 U2.23
  L1 (SIgnal) w0.3: C9.1 84.875,88.925 85.075,88.925 ; v1(89.275,79.425) 89.356,79.425 89.531,79.6 89.95,79.6 C14.1 ; C14.1@90,79.75 90.55,80.3 90.975,80.3 ; v1(92.75,88.05) 92.831,88.05 93.281,88.5 R7.1 ; 92.8,85 92.8,85.1 93,85.3 ; 97.3,77.1 97.3,76.7 C15.1@97.85,76.15 ; 99.1,83.3 99.272,83.3 99.422,83.45 99.85,83.45 C16.1 ; v1(102.95,80.375) D4.1 ; 103.175,83.7 D5.1 ; v1(111.475,71.725) 111.487,71.713 111.487,70.812 R1.1@111.525,70.775
  L1 (SIgnal) w0.35: 93,85.3 C.1 ; v1(110.9,72.6) R9.1 ; R8.1 v1(110.95,90.725)
  L1 (SIgnal) w0.5: v1(83.6,90.8) 83.612,90.812 84.637,90.812 C10.1 ; C7.1 85.125,79.025 85.075,78.975 84.302,78.975 84.127,78.8 v1(84.1,78.8) 85.125,77.775 X1.4 ; X1.2 87.525,74.825 v1(87.55,74.8) ; v1(87.55,82.5) C12.1 88.85,82.5 89.075,82.725 89.95,82.725 C13.1 ; C8.1 88.575,79.125 88.875,79.425 v1(89.275,79.425) ; J3.6 95.125,67.6 95.375,67.85 v1(95.4,67.85) ; v1(95.15,74.775) C5.1 ; v1(97.85,75.075) C15.1 ; v1(98.5,92.325) 98.675,92.5 C6.1 99.5,91.617 100.161,90.956 100.161,90.439 100.2,90.4 100.215,90.4 J2.5 ; v1(99.975,76.275) 99.987,76.288 99.987,77.237 R4.1 ; C3.1 v1(106.725,74.5) ; U1.1@106.29,72.035 U1.1 ; U1.1@106.3,72.025 106.275,72.05 106.275,73.125 v1(106.3,73.1) ; C4.1 109.232,69.893 109.225,69.9 109.225,71.375 v1(109.25,71.4) ; R1.1 R1.1@111.525,70.775
  L1 (SIgnal) w0.56: v1(83.65,88.775) C9.1 ; C17.1 v1(89.075,86.375) ; C11.1 92.714,88.075 92.739,88.05 v1(92.75,88.05)
  other v2: 84.9,63.65 84.25,65.575 81.6,66.8 85.825,67.425 83.5,67.825 80.2,68.675 84.65,69.6 113.45,69.6 82.175,69.825 96.25,70.2 88.775,71.025 80.175,71.325 113.4,72.2 96.2,73.225 83.6,73.525 108.975,74.575 100.7,74.75 113.425,74.75 84.125,80.6 84.125,82.4 106.125,85.4 113.1,88.2 108.575,89.425 113.125,91.15 108.525,91.7 108.5,94.025 84.775,95.625 90.8,95.625 87.65,95.675 109.675,95.725 107.3,95.75 94,95.8
  other v3: 92.853,78.845 93.953,78.845 95.053,78.845 96.153,78.845 97.253,78.845 92.853,79.945 93.953,79.945 95.053,79.945 96.153,79.945 97.253,79.945 92.853,81.045 93.953,81.045 95.053,81.045 96.153,81.045 97.253,81.045 92.853,82.145 93.953,82.145 95.053,82.145 96.153,82.145 97.253,82.145 93.953,83.245 95.053,83.245 96.153,83.245 87.7,89.45 87.7,90.55
IMU_CPOUT: C11.2 U3.20 | length 1.6
  L1 (SIgnal) w0.25: U3.20 90.85,89.25 91.025,89.075 C11.2
IMU_INT: U2.45 U3.12 | length 16
  L1 (SIgnal) w0.25: U3.12 86.025,88.75 85.975,88.7 85.975,88.45 84.75,87.225 84.75,85.75 85.25,85.25 89.5,85.25 91.225,86.975 93.4,86.975 93.7,86.675 93.7,85.014 93.803,84.911 U2.45
IMU_REGOUT: C9.2 U3.10 | length 1.2
  L1 (SIgnal) w0.25: C9.2@85.05,89.75 U3.10
IMU_SCL: R2.1 U2.42 U3.24 | length 12.6
  L1 (SIgnal) w0.25: U3.24 95.525,91.25 96,90.775 R2.1 96,85.725 95.303,85.028 U2.42
IMU_SDA: R3.1 U2.43 U3.23 | length 11.1
  L1 (SIgnal) w0.25: U3.23 94.675,90.75 95,90.425 R3.1 95.175,89.575 95.175,89.379 95.175,86.2 94.803,85.828 U2.43
LED_PWR_K: D1.K R1.2 | length 1.2
  L1 (SIgnal) w0.25: D1.K R1.2
"MCU BOOT0": R7.2 U2.44 | length 3.1
  L1 (SIgnal) w0.25: R7.2 94.225,87.475 94.225,85.125 94.303,85.047 U2.44
MCU_LED_A: D2.A U2.26 | length 1.6
  L1 (SIgnal) w0.25: U2.26 99.955,78.795 D2.A
MCU_LED_K: D2.K R4.2 | length 1.5
  L1 (SIgnal) w0.25: R4.2 D2.K
MCU_NRST: C6.2 J2.3 R5.1 U2.7 | length 27.8
  L1 (SIgnal) w0.2: v1(89.775,80.675) 89.85,80.75 90.43,80.75 90.475,80.795 U2.7
  L1 (SIgnal) w0.25: C6.2 101.7,92.5 101.75,92.45 101.5,92.2 J2.3
  L1 (SIgnal) w0.3: C6.2 v1(100.5,93.725)
  L4 (SIgnal) w0.3: v1(89.775,80.675) 89.775,82.403 89.65,82.528 89.65,84.175 90.875,85.4 95.275,85.4 97.225,87.35 97.225,92.225 98.725,93.725 v1(100.5,93.725)
MCU_OSC_IN: C7.2 U2.5 X1.1 | length 11.8
  L1 (SIgnal) w0.2: X1.1 85.325,75.875 86.35,76.9 86.35,78.425 86.228,78.547 86.228,78.972 C7.2 86.125,81.375 86.545,81.795 U2.5
MCU_OSC_OUT: R6.2 U2.6 | length 3.6
  L1 (SIgnal) w0.2: R6.2 88.765,80.515 88.765,80.765 89.295,81.295 U2.6
MCU_PA4: J3.2 U2.14 | length 13.1
  L1 (SIgnal) w0.25: J3.2 90.125,74.5 92.803,77.178 U2.14
MCU_PA5: J3.3 U2.15 | length 12.8
  L1 (SIgnal) w0.25: J3.3 91.4,65.675 91.4,74.4 93.303,76.303 U2.15
MCU_PA6: J3.4 U2.16 | length 12.5
  L1 (SIgnal) w0.25: J3.4 92.625,74.275 93.803,75.453 U2.16
MCU_PA7: J3.5 U2.17 | length 12.2
  L1 (SIgnal) w0.25: J3.5 93.85,65.675 93.85,73.975 94.303,74.428 U2.17
MCU_SWCLK: J2.4 U2.37 | length 7.5
  L1 (SIgnal) w0.25: U2.37 97.803,85.128 98.25,85.575 100.525,85.575 101.5,86.55 J2.4
MCU_SWDIO: J2.2 U2.34 | length 9.5
  L1 (SIgnal) w0.25: U2.34 100.845,82.795 102.77,84.72 J2.2
MCU_SWO: J2.6 U2.39 | length 7.2
  L1 (SIgnal) w0.25: U2.39 96.803,85.753 97.6,86.55 99.45,86.55 100.23,87.33 J2.6
MCU_VCAP1: C5.2 U2.22 | length 1.7
  L1 (SIgnal) w0.235: 96.8,77 96.803,77.003 U2.22
  L1 (SIgnal) w0.3: 96.8,77 96.8,76.25 C5.2@96.85,76.2
  L1 (SIgnal) w0.35: C5.2 C5.2@96.85,76.2
NetJ1_A5: J1.A5 R9.2 | length 7.6
  L1 (SIgnal) w0.25: J1.A5 v1(110,80.275)
  L1 (SIgnal) w0.3: R9.2 v1(110.9,77.775)
  L4 (SIgnal) w0.25: v1(110,80.275) 110.9,79.375 v1(110.9,77.775)
NetJ1_B5: J1.B5 R8.2 | length 7.5
  L1 (SIgnal) w0.25: J1.B5 109.755,83.275 110.005,83.025 v1(110.1,83.025)
  L1 (SIgnal) w0.3: v1(110.925,85.05) R8.2@110.925,88.418
  L4 (SIgnal) w0.25: v1(110.1,83.025) 110.925,83.85 v1(110.925,85.05)
USB_D_N: D4.2 J1.A7 J1.B7 U2.32 | length 16.2
  L1 (SIgnal) w0.26: U2.32 98.717,81.795 98.736,81.813 103.484,81.813 103.504,81.793 107.8,81.793 ; D4.2 107.253,80.375 107.633,80.755 108.455,80.755 J1.B7 107.625,80.775 107.311,81.089 107.311,81.304 107.8,81.793 ; J1.A7 108.457,81.793 107.8,81.793
USB_D_P: D5.2 J1.A6 J1.B6 U2.33 | length 15.8
  L1 (SIgnal) w0.26: U2.33 98.717,82.295 98.736,82.276 103.676,82.276 103.696,82.257 107.122,82.257 ; D5.2 105.697,83.7 107.122,82.275 J1.B6 108.495,82.255 109.187,82.255 109.588,81.854 109.588,81.696 109.187,81.295 108.495,81.295 J1.A6
XTAL_IN: C8.2 R6.1 X1.3 | length 2.6
  L1 (SIgnal) w0.2: X1.3 87.625,77.875 87.625,79.075 R6.1@87.625,80.325
pads on no net: J1.A8 J1.B8 J2.MH J3. U2.2 U2.3 U2.4 U2.10 U2.11 U2.12 U2.13 U2.18 U2.19 U2.20 U2.21 U2.25 U2.27 U2.28 U2.29 U2.30 U2.31 U2.38 U2.40 U2.41 U2.46 U3.2 U3.3 U3.4 U3.5 U3.6 U3.7 U3.14 U3.15 U3.16 U3.17 U3.19 U3.21 U3.22

## Polygon pours and split planes (outlines as drawn)
GND on L1 (SIgnal) "GND_L01_P010" (solid, pour order 10): 105.425,73.5 105.575,73.35 105.575,71.475 105.675,71.375 107.175,71.375 108.3,70.25 108.3,69.275 108.475,69.1 110,69.1 110.2,69.3 110.2,70.625 110.1,70.725 109.8,70.725 109.675,70.85 109.675,71.825 109.5,72 108.4,72 107.175,73.225 107.175,74.875 106.675,75.375 106,75.375 105.575,75.8 105,75.8 104.875,75.925 104.875,77.375 105.125,77.625 106.925,77.625 107.275,77.975 109.025,77.975 109.075,78.025 109.075,78.625 109.05,78.65 107.25,78.65 106.825,78.225 104.25,78.225 104.175,78.15 104.175,75.9 104.325,75.75 104.325,73.675 104.5,73.5
+5V on L1 (SIgnal) "+5V_L01_P014" (solid, pour order 14): 109.075,79.425 105.575,79.425 105.4,79.25 103.725,79.25 103.275,78.8 103.275,76 102.8,75.525 102.15,75.525 102.025,75.4 102.025,73.65 101,72.625 101,71.5 101.15,71.35 102.325,71.35 102.4,71.425 102.4,72.75 103.15,73.5 103.55,73.5 103.7,73.65 103.7,75.775 104.025,76.1 104.025,78.525 104.275,78.775 105.55,78.775 105.6,78.825 109.075,78.825
+3V3 on L1 (SIgnal) "+3V3_L01_P007" (solid, pour order 7): 105.225,66.825 105.2,66.825 104.4,67.625 103.65,67.625 103.3,67.975 103.3,72.65 103.425,72.775 104.575,72.775 104.7,72.65 104.7,68.425 105.65,67.475 107.55,67.475 107.775,67.7 107.775,68 108.45,68.675 110.2,68.675 110.35,68.525 110.35,66.9 110.175,66.725 106.25,66.725 105.925,66.4 105.925,64.975 105.65,64.7 102.275,64.7 102.25,64.675 102.125,64.8 102.125,66.025 102.325,66.225 105.075,66.225 105.225,66.375
GND on L2 (GND) "GND_L02_P003" (solid, pour order 3): 80,95 cw(c81,95) 81,96 113,96 cw(c113,95) 114,95 114,63 cw(c113,63) 113,62 81,62 cw(c81,63) 80,63
GND on L3 (GND) "GND_L03_P004" (solid, pour order 4): 80,95 cw(c81,95) 81,96 113,96 cw(c113,95) 114,95 114,63 cw(c113,63) 113,62 81,62 cw(c81,63) 80,63

## Silkscreen, mask and mechanical layers (free items; w line width, h text height)
Top Overlay:
  text "SWD" at 97.75,86 h1.2
  text "GPIO" at 89.55,67.55 h1.2
Mechanical 1:
  the board outline again, w0.254

## Text inside footprints (layer, text, board x,y; h text height)
D1: Mechanical 13 "+" at 110.992,66.117 h0.5 r90
D2: Mechanical 13 "+" at 98.617,79.258 h0.5